# EAGLE board Demo Board v1 (EAGLE 7.1.0)

Size 88.9 x 50.8 mm. Coordinates in mm from the lower left corner, seen from the top.
Outline: 0,47.62 0,3.17 arc90 3.17,0 85.72,0 arc90 88.9,3.17 88.9,47.62 arc90 85.72,50.8 3.17,50.8 arc90 0,47.62
Copper layers (1*16): Top 0.035mm / dielectric 1.5mm / Bottom 0.035mm
Design rules "SeeedStudio_2layer_DRU_no_angle_20140221": minimum track width 6mil, minimum drill 12mil, track to track 6mil, track to pad 6mil, pad to pad 6mil, via to via 6mil, smd to smd 0mil, copper to edge 10mil, drill to drill 10mil, minimum pad ring 10mil, minimum via ring 6mil, stop-mask expansion 2mil, vias tented up to drill 100mil, thermal gap 10mil

## Footprints (pad centres in the part's own frame; a part is rotated, then mirrored left to right if it is on the bottom)
WS2812B = smd 1.651 x 1: 1 -2.577,1.6; 2 -2.577,-1.6; 3 2.577,-1.6; 4 2.577,1.6
FIDUCIAL-1X2 = smd 1 x 1: 1 0,0
HVQFN32 = smd 0.7 x 0.28: 1 -2.35,1.75; 2 -2.35,1.25; 3 -2.35,0.75; 4 -2.35,0.25; 5 -2.35,-0.25; 6 -2.35,-0.75; 7 -2.35,-1.25; 8 -2.35,-1.75; 17 2.35,-1.75; 18 2.35,-1.25; 19 2.35,-0.75; 20 2.35,-0.25; 21 2.35,0.25; 22 2.35,0.75; 23 2.35,1.25; 24 2.35,1.75 | smd 0.28 x 0.7: 9 -1.75,-2.35; 10 -1.25,-2.35; 11 -0.75,-2.35; 12 -0.25,-2.35; 13 0.25,-2.35; 14 0.75,-2.35; 15 1.25,-2.35; 16 1.75,-2.35; 25 1.75,2.35; 26 1.25,2.35; 27 0.75,2.35; 28 0.25,2.35; 29 -0.25,2.35; 30 -0.75,2.35; 31 -1.25,2.35; 32 -1.75,2.35 | smd 3.5 x 3.5: EXP 0,0 | smd 0.25 x 0.25: M1 -2.415,2.415
R0402 = smd 0.7 x 0.9: 1 -0.65,0; 2 0.65,0
R0603 = smd 1 x 1.1: 1 -0.85,0; 2 0.85,0
R0805 = smd 1.3 x 1.5: 1 -0.95,0; 2 0.95,0
R1206 = smd 1.6 x 1.803: 1 -1.422,0; 2 1.422,0
SOP08 = smd 0.6 x 2.2: 1 -1.905,-2.6; 2 -0.635,-2.6; 3 0.635,-2.6; 4 1.905,-2.6; 5 1.905,2.6; 6 0.635,2.6; 7 -0.635,2.6; 8 -1.905,2.6
SOP16 = smd 0.6 x 2.2: 1 -4.445,-3.6; 2 -3.175,-3.6; 3 -1.905,-3.6; 4 -0.635,-3.6; 5 0.635,-3.6; 6 1.905,-3.6; 7 3.175,-3.6; 8 4.445,-3.6; 9 4.445,3.6; 10 3.175,3.6; 11 1.905,3.6; 12 0.635,3.6; 13 -0.635,3.6; 14 -1.905,3.6; 15 -3.175,3.6; 16 -4.445,3.6
SOT23-3 = smd 0.8 x 0.9: 1 -0.95,-1; 2 0.95,-1; 3 0,1
SOT223 = smd 1.219 x 2.235: 1 -2.311,-3.099; 2 0,-3.099; 3 2.311,-3.099 | smd 3.6 x 2.2: 4 0,3.099
TO-252 = smd 1 x 1.6: 1 -2.28,-4.8; 2 2.28,-4.8 | smd 5.4 x 6.2: 3 0,2.5
TQFP32-08 = smd 1.27 x 0.559: 1 -4.293,2.8; 2 -4.293,2; 3 -4.293,1.2; 4 -4.293,0.4; 5 -4.293,-0.4; 6 -4.293,-1.2; 7 -4.293,-2; 8 -4.293,-2.8; 17 4.293,-2.8; 18 4.293,-2; 19 4.293,-1.2; 20 4.293,-0.4; 21 4.293,0.4; 22 4.293,1.2; 23 4.293,2; 24 4.293,2.8 | smd 0.559 x 1.27: 9 -2.8,-4.293; 10 -2,-4.293; 11 -1.2,-4.293; 12 -0.4,-4.293; 13 0.4,-4.293; 14 1.2,-4.293; 15 2,-4.293; 16 2.8,-4.293; 25 2.8,4.293; 26 2,4.293; 27 1.2,4.293; 28 0.4,4.293; 29 -0.4,4.293; 30 -1.2,4.293; 31 -2,4.293; 32 -2.8,4.293
TQFP48 = smd 0.3 x 1.5: 1 -2.75,-4.25; 2 -2.25,-4.25; 3 -1.75,-4.25; 4 -1.25,-4.25; 5 -0.75,-4.25; 6 -0.25,-4.25; 7 0.25,-4.25; 8 0.75,-4.25; 9 1.25,-4.25; 10 1.75,-4.25; 11 2.25,-4.25; 12 2.75,-4.25; 25 2.75,4.25; 26 2.25,4.25; 27 1.75,4.25; 28 1.25,4.25; 29 0.75,4.25; 30 0.25,4.25; 31 -0.25,4.25; 32 -0.75,4.25; 33 -1.25,4.25; 34 -1.75,4.25; 35 -2.25,4.25; 36 -2.75,4.25 | smd 1.5 x 0.3: 13 4.25,-2.75; 14 4.25,-2.25; 15 4.25,-1.75; 16 4.25,-1.25; 17 4.25,-0.75; 18 4.25,-0.25; 19 4.25,0.25; 20 4.25,0.75; 21 4.25,1.25; 22 4.25,1.75; 23 4.25,2.25; 24 4.25,2.75; 37 -4.25,2.75; 38 -4.25,2.25; 39 -4.25,1.75; 40 -4.25,1.25; 41 -4.25,0.75; 42 -4.25,0.25; 43 -4.25,-0.25; 44 -4.25,-0.75; 45 -4.25,-1.25; 46 -4.25,-1.75; 47 -4.25,-2.25; 48 -4.25,-2.75
TQFP100 = smd 0.27 x 1.5: 1 -6,-7.75; 2 -5.5,-7.75; 3 -5,-7.75; 4 -4.5,-7.75; 5 -4,-7.75; 6 -3.5,-7.75; 7 -3,-7.75; 8 -2.5,-7.75; 9 -2,-7.75; 10 -1.5,-7.75; 11 -1,-7.75; 12 -0.5,-7.75; 13 0,-7.75; 14 0.5,-7.75; 15 1,-7.75; 16 1.5,-7.75; 17 2,-7.75; 18 2.5,-7.75; 19 3,-7.75; 20 3.5,-7.75; 21 4,-7.75; 22 4.5,-7.75; 23 5,-7.75; 24 5.5,-7.75; 25 6,-7.75; 51 6,7.75; 52 5.5,7.75; 53 5,7.75; 54 4.5,7.75; 55 4,7.75; 56 3.5,7.75; 57 3,7.75; 58 2.5,7.75; 59 2,7.75; 60 1.5,7.75; 61 1,7.75; 62 0.5,7.75; 63 0,7.75; 64 -0.5,7.75; 65 -1,7.75; 66 -1.5,7.75; 67 -2,7.75; 68 -2.5,7.75; 69 -3,7.75; 70 -3.5,7.75; 71 -4,7.75; 72 -4.5,7.75; 73 -5,7.75; 74 -5.5,7.75; 75 -6,7.75 | smd 1.5 x 0.27: 26 7.75,-6; 27 7.75,-5.5; 28 7.75,-5; 29 7.75,-4.5; 30 7.75,-4; 31 7.75,-3.5; 32 7.75,-3; 33 7.75,-2.5; 34 7.75,-2; 35 7.75,-1.5; 36 7.75,-1; 37 7.75,-0.5; 38 7.75,0; 39 7.75,0.5; 40 7.75,1; 41 7.75,1.5; 42 7.75,2; 43 7.75,2.5; 44 7.75,3; 45 7.75,3.5; 46 7.75,4; 47 7.75,4.5; 48 7.75,5; 49 7.75,5.5; 50 7.75,6; 76 -7.75,6; 77 -7.75,5.5; 78 -7.75,5; 79 -7.75,4.5; 80 -7.75,4; 81 -7.75,3.5; 82 -7.75,3; 83 -7.75,2.5; 84 -7.75,2; 85 -7.75,1.5; 86 -7.75,1; 87 -7.75,0.5; 88 -7.75,0; 89 -7.75,-0.5; 90 -7.75,-1; 91 -7.75,-1.5; 92 -7.75,-2; 93 -7.75,-2.5; 94 -7.75,-3; 95 -7.75,-3.5; 96 -7.75,-4; 97 -7.75,-4.5; 98 -7.75,-5; 99 -7.75,-5.5; 100 -7.75,-6
TSSOP20 = smd 0.305 x 0.991: 1 -2.925,-2.918; 2 -2.275,-2.918; 3 -1.625,-2.918; 4 -0.975,-2.918; 5 -0.325,-2.918; 6 0.325,-2.918; 7 0.975,-2.918; 8 1.625,-2.918; 9 2.275,-2.918; 10 2.925,-2.918; 11 2.925,2.918; 12 2.275,2.918; 13 1.625,2.918; 14 0.975,2.918; 15 0.325,2.918; 16 -0.325,2.918; 17 -0.975,2.918; 18 -1.625,2.918; 19 -2.275,2.918; 20 -2.925,2.918

## Placement (x,y rotation side)
5050  [WS2812B]  62.23,8.89 180 top
FID-1  [FIDUCIAL-1X2]  3.81,3.81 0 top
FID-2  [FIDUCIAL-1X2]  85.09,46.99 0 top
FID-3  [FIDUCIAL-1X2]  52.07,29.21 0 top
FID-4  [FIDUCIAL-1X2]  62.23,39.37 0 top
FID-5  [FIDUCIAL-1X2]  38.1,6.35 0 top
FID-6  [FIDUCIAL-1X2]  53.34,21.59 0 top
FID-7  [FIDUCIAL-1X2]  58.42,15.24 0 top
FID-8  [FIDUCIAL-1X2]  66.04,22.86 0 top
QFN-32  [HVQFN32]  62.23,19.05 0 top
R0402-1  [R0402]  17.78,21.59 270 top
R0402-2  [R0402]  20.32,20.32 45 top
R0402-3  [R0402]  21.59,17.78 0 top
R0402-4  [R0402]  20.32,15.24 135 top
R0402-5  [R0402]  17.78,13.97 90 top
R0402-6  [R0402]  15.24,15.24 45 top
R0402-7  [R0402]  13.97,17.78 180 top
R0402-8  [R0402]  15.24,20.32 135 top
R0603-1  [R0603]  17.78,25.4 180 top
R0603-2  [R0603]  22.86,22.86 135 top
R0603-3  [R0603]  25.4,17.78 270 top
R0603-4  [R0603]  22.86,12.7 225 top
R0603-5  [R0603]  17.78,10.16 180 top
R0603-6  [R0603]  12.7,12.7 315 top
R0603-7  [R0603]  10.16,17.78 270 top
R0603-8  [R0603]  12.7,22.86 45 top
R0805-1  [R0805]  17.78,29.21 180 top
R0805-2  [R0805]  25.77,25.77 315 top
R0805-3  [R0805]  29.21,17.78 270 top
R0805-4  [R0805]  25.77,9.79 225 top
R0805-5  [R0805]  17.78,6.35 0 top
R0805-6  [R0805]  9.79,9.79 135 top
R0805-7  [R0805]  6.35,17.78 90 top
R0805-8  [R0805]  9.79,25.77 45 top
R1206-1  [R1206]  17.78,33.02 0 top
R1206-2  [R1206]  29.21,29.21 135 top
R1206-3  [R1206]  33.02,17.78 90 top
R1206-4  [R1206]  29.21,6.35 225 top
R1206-5  [R1206]  17.78,2.54 180 top
R1206-6  [R1206]  6.35,6.35 315 top
R1206-7  [R1206]  2.54,17.78 270 top
R1206-8  [R1206]  6.35,29.21 45 top
SOP-08  [SOP08]  68.58,34.29 0 top
SOP-16  [SOP16]  80.01,33.02 0 top
SOT-23-1  [SOT23-3]  76.2,13.34 180 top
SOT-23-2  [SOT23-3]  80.64,10.79 120 top
SOT-23-3  [SOT23-3]  80.64,5.71 60 top
SOT-23-4  [SOT23-3]  76.2,3.17 0 top
SOT-23-5  [SOT23-3]  71.75,5.71 300 top
SOT-23-6  [SOT23-3]  71.75,10.79 240 top
SOT-223  [SOT223]  11.43,43.18 0 top
SOT-252  [TO-252]  24.13,43.18 90 top
TQFP-32  [TQFP32-08]  44.45,34.29 0 top
TQFP-48  [TQFP48]  57.15,34.29 270 top
TQFP-100  [TQFP100]  45.72,13.97 180 top
TSSOP-20  [TSSOP20]  76.2,19.05 0 top

## Library data of the parts
5050 = SparkFun-LED
FID-1-FID-8 = SparkFun-Aesthetics
QFN-32 R1206-1-R1206-8 SOP-08 SOP-16 TQFP-32 TQFP-48 TQFP-100 TSSOP-20 = ref-packages
R0402-1-R0402-8 R0603-1-R0603-8 R0805-1-R0805-8 = rcl
SOT-23-1-SOT-23-6 = GeekAmmo
SOT-223 SOT-252 = SparkFun-PowerIC

## Text on the board
tNames: SOT-223 | SOT-252 | OpenPnP Demo Board v1 | http://openpnp.org | TQFP-32 | TQFP-48 | SOP-08 | SOP-16 | 0402 | 0603 | 0805 | 1206 | TQFP-100 | QFN-32 | TSSOP-20 | 5050 | SOT23
Document: * FIDS are missing keepout